# EAGLE board godwit-v01-panel (EAGLE 6.4), part 1 of 2
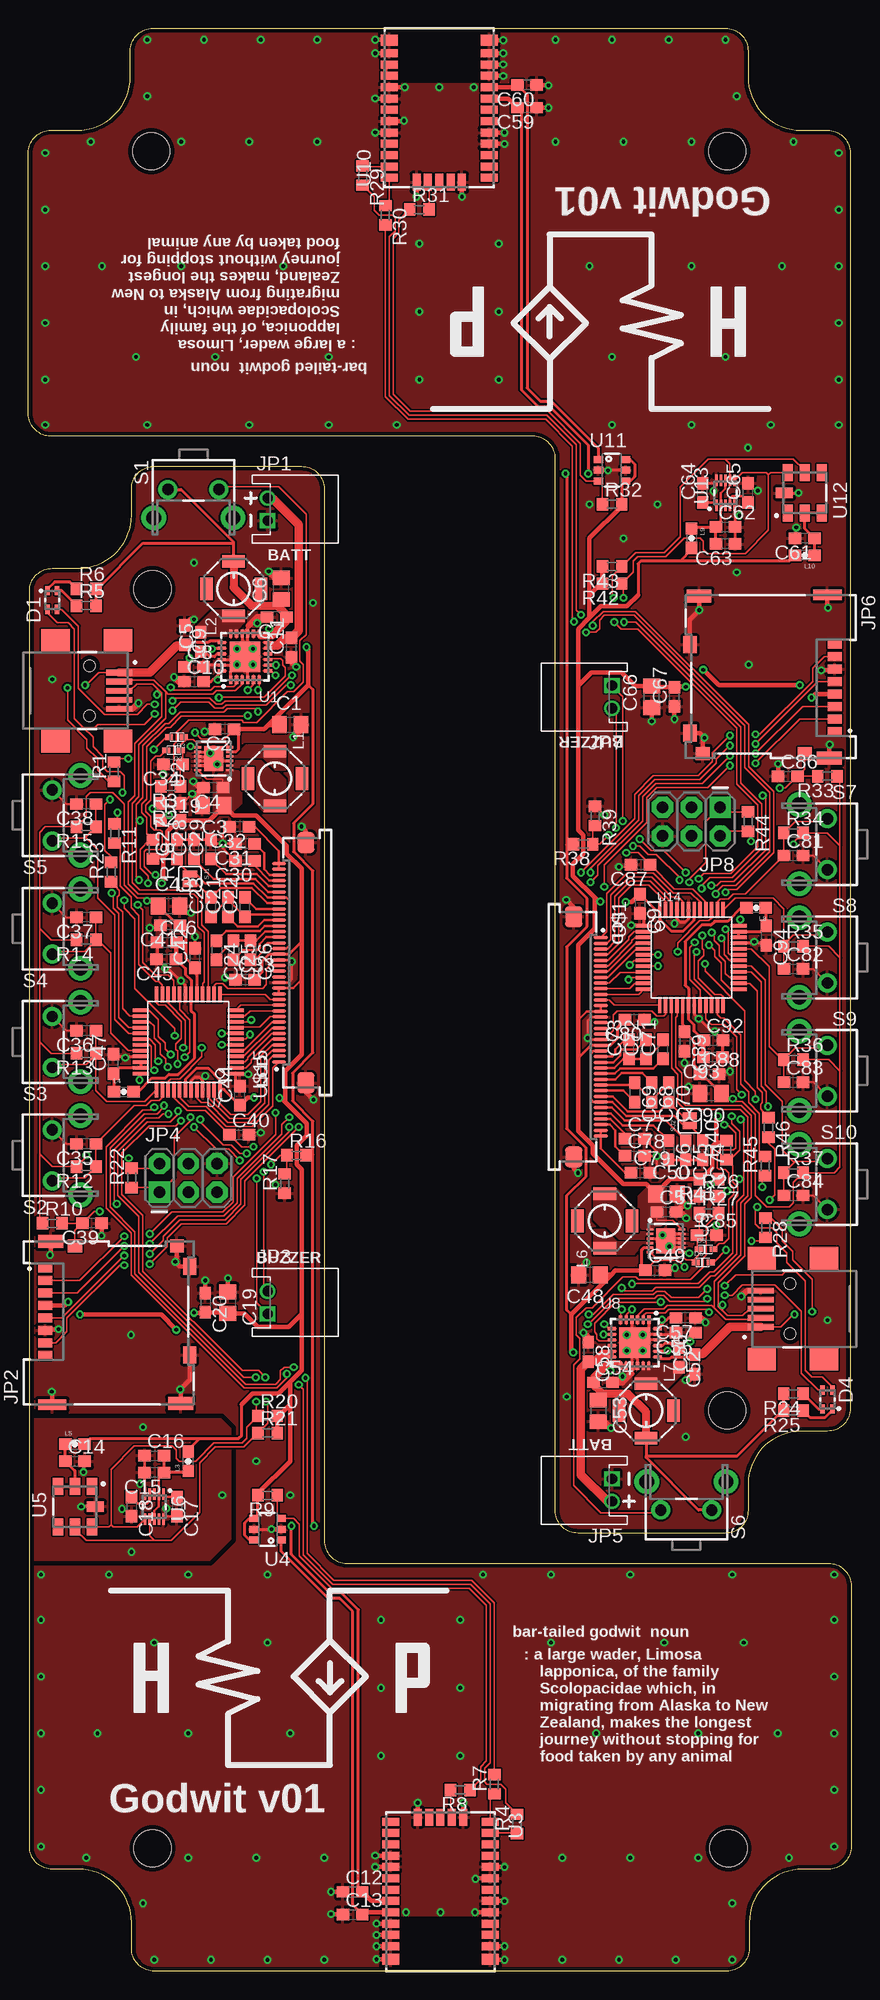
[diagram p0: board, top side]
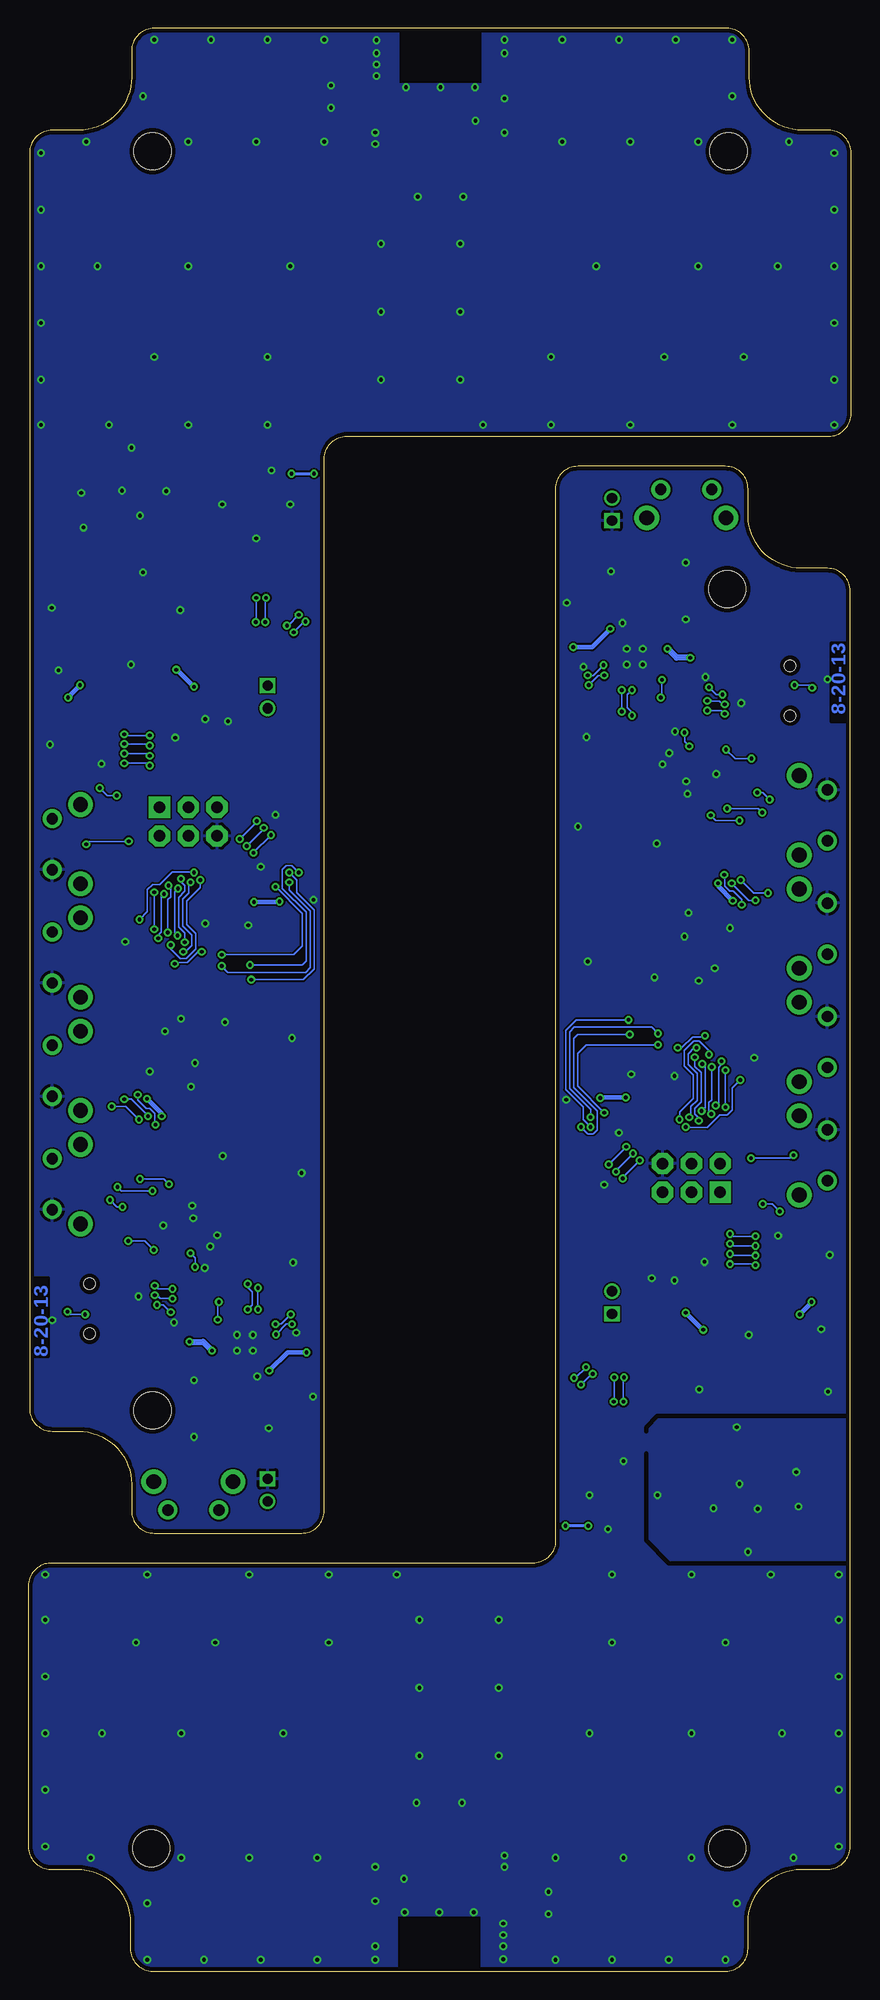
[diagram p1: board, bottom side, seen from below]

Size 72.61 x 171.45 mm. Coordinates in mm from the lower left corner, seen from the top.
Outline: 4.41,9 2.11,9 arc-90 0.11,11 0.11,121.8 arc-90 2.11,123.8 4.41,123.8 arc90 9.11,128.5 9.11,130.8 arc-90 11.11,132.8 24.11,132.8 arc-90 26.11,130.8 26.11,38 arc90 28.11,36 70.61,36 arc-90 72.61,34 72.61,11 arc-90 70.61,9 68.31,9 arc90 63.61,4.3 63.61,2 arc-90 61.61,0 11.11,0 arc-90 9.11,2 9.11,4.3 arc90 4.41,9
Outline: 68.2,162.45 70.5,162.45 arc-90 72.5,160.45 72.5,49.65 arc-90 70.5,47.65 68.2,47.65 arc90 63.5,42.95 63.5,40.65 arc-90 61.5,38.65 48.5,38.65 arc-90 46.5,40.65 46.5,133.45 arc90 44.5,135.45 2,135.45 arc-90 0,137.45 0,160.45 arc-90 2,162.45 4.3,162.45 arc90 9,167.15 9,169.45 arc-90 11,171.45 61.5,171.45 arc-90 63.5,169.45 63.5,167.15 arc90 68.2,162.45
Copper layers (1*16): Top 0.0356mm / dielectric 1.5011mm / Bottom 0.0356mm
Design rules "OSHPark *": minimum track width 6mil, minimum drill 13mil, track to track 6mil, track to pad 6mil, pad to pad 6mil, via to via 6mil, smd to smd 6mil, copper to edge 15mil, drill to drill 6mil, minimum pad ring 7mil, minimum via ring 7mil, stop-mask expansion 4mil, vias tented up to drill 13mil, thermal gap 10mil
Holes 3.26 mm at 10.95,10.84 61.77,10.84 10.95,121.96 61.66,160.61 10.84,160.61 61.66,49.49
tKeepout: area 8.1,8 to 13.8,13.6; area 59,8 to 64.6,13.6; area 8.1,119.2 to 13.8,124.8
tRestrict: 7 lines
bRestrict: 7 lines

## Footprints (pad centres in the part's own frame; a part is rotated, then mirrored left to right if it is on the bottom)
C0805 = smd 1.3 x 1.5: 1 -0.95,0; 2 0.95,0
C0603 = smd 1.1 x 1: 1 -0.85,0; 2 0.85,0
LED-2-1.6X1.25 = smd 0.8 x 0.4: 1 0.825,0.43; 2 -0.825,0.43; 3 0.825,-0.43; 4 -0.825,-0.43
SOD523 = smd 0.7 x 0.5: A 0.7,0; C -0.6,0
USB-MINIB-M26FTR = smd 0.5 x 2.3: 1 -1.6,0.1; 2 -0.8,0.1; 3 0,0.1; 4 0.8,0.1; 5 1.6,0.1 | smd 2 x 2.5: SHIELD1 -4.45,0; SHIELD2 -4.45,-5.5; SHIELD3 4.45,0; SHIELD4 4.45,-5.5 | hole 1: -2.2,-2.5; 2.2,-2.5
JST-PH-2-RA = drill 0.9 square: 1 1,0 | drill 0.9: 2 -1,0
MICROSD-5031821853 = smd 0.8 x 1.24: 1 12.045,0.63; 2 10.945,0.63; 3 9.845,0.63; 4 8.745,0.63; 5 7.645,0.63; 6 6.545,0.63; 7 5.445,0.63; 8 4.345,0.63 | smd 1.16 x 1.25: CRD_DETH 13.985,-2 | smd 1.16 x 1.2: CRD_DETL 13.985,-11 | smd 0.95 x 2.5: SHIELD1 0,0 | smd 1.15 x 2.2: SHIELD2 0.1,-11.33; SHIELD5 14.39,0.15 | smd 1.5 x 1.15: SHIELD3 4.405,-12.125; SHIELD4 12.185,-12.125
2X3-NS = drill 1.016 pad 1.88 square: 1 -2.54,-1.27 | drill 1.016 pad 1.88 octagon: 2 -2.54,1.27; 3 0,-1.27; 4 0,1.27; 5 2.54,-1.27; 6 2.54,1.27
SRU5028 = smd 1.1 x 2: 1 -2.4,0; 2 2.4,0 | smd 2 x 1.1: 3 0,-2.4; 4 0,2.4
0603 = smd 1.1 x 1: 1 -0.85,0; 2 0.85,0
R0603 = smd 1 x 1.1: 1 -0.85,0; 2 0.85,0
FSMRA = drill 1 pad 1.676: 1 -2.25,0; 3 2.25,0 | drill 1.3 pad 2.184: SHIELD1 -3.5,2.49; SHIELD2 3.5,2.49
SJ_2S = smd 0.635 x 1.27: 1 -0.412,0; 2 0.412,0
VQFN-24 = smd 0.28 x 0.71: 1 1.251,2.044; 2 0.751,2.044; 3 0.251,2.044; 4 -0.249,2.044; 5 -0.749,2.044; 6 -1.249,2.044; 13 -1.251,-2.044; 14 -0.751,-2.044; 15 -0.251,-2.044; 16 0.249,-2.044; 17 0.749,-2.044; 18 1.249,-2.044 | smd 0.71 x 0.28: 7 -2.044,1.251; 8 -2.044,0.751; 9 -2.044,0.251; 10 -2.044,-0.249; 11 -2.044,-0.749; 12 -2.044,-1.249; 19 2.044,-1.251; 20 2.044,-0.751; 21 2.044,-0.251; 22 2.044,0.249; 23 2.044,0.749; 24 2.044,1.249 | smd 2.7 x 2.7: PAD 0,0
WSON-12 = smd 0.2 x 0.6: 1 -1,-1.405; 2 -0.6,-1.405; 3 -0.2,-1.405; 4 0.2,-1.405; 5 0.6,-1.405; 6 1,-1.405; 7 1,1.405; 8 0.6,1.405; 9 0.2,1.405; 10 -0.2,1.405; 11 -0.6,1.405; 12 -1,1.405 | smd 2.2 x 1.68: PAD 0,0
UC530 = smd 0.7 x 1.5: 1 -6.2,-4.4; 2 -5.2,-4.4; 3 -4.2,-4.4; 4 -3.2,-4.4; 5 -2.2,-4.4; 6 -1.2,-4.4; 7 -0.2,-4.4; 8 0.8,-4.4; 9 1.8,-4.4; 10 2.8,-4.4; 11 3.8,-4.4; 12 4.8,-4.4; 15 4.8,4.4; 16 3.8,4.4; 17 2.8,4.4; 18 1.8,4.4; 19 0.8,4.4; 20 -0.2,4.4; 21 -1.2,4.4; 22 -2.2,4.4; 23 -3.2,4.4; 24 -4.2,4.4; 25 -5.2,4.4; 26 -6.2,4.4 | smd 1 x 1.5: 13 5.95,-4.4; 14 5.95,4.4 | smd 1.5 x 0.7: 27 -6.6,2; 28 -6.6,1; 29 -6.6,0; 30 -6.6,-1; 31 -6.6,-2
SOT23-6 = smd 0.63 x 0.8: 1 -0.95,-1.2; 2 0,-1.2; 3 0.95,-1.2; 4 0.95,1.2; 5 0,1.2; 6 -0.95,1.2
BMP180 = smd 0.9 x 1.5: 1 1.5,1.8; 2 0,1.8; 3 -1.5,1.8; 4 -1.5,-1.8; 5 0,-1.8; 6 1.5,-1.8 | smd 1.5 x 0.9: 7 1.8,0
DFN-10-2X2 = smd 1 x 0.225: 1 -1.1,0.8; 2 -1.1,0.4; 3 -1.1,0; 4 -1.1,-0.4; 5 -1.1,-0.8; 6 1.1,-0.8; 7 1.1,-0.4; 8 1.1,0; 9 1.1,0.4; 10 1.1,0.8
TQFP48 = smd 1.4 x 0.3: 1 -4.191,2.794; 2 -4.191,2.286; 3 -4.191,1.778; 4 -4.191,1.27; 5 -4.191,0.762; 6 -4.191,0.254; 7 -4.191,-0.254; 8 -4.191,-0.762; 9 -4.191,-1.27; 10 -4.191,-1.778; 11 -4.191,-2.286; 12 -4.191,-2.794; 25 4.191,-2.794; 26 4.191,-2.286; 27 4.191,-1.778; 28 4.191,-1.27; 29 4.191,-0.762; 30 4.191,-0.254; 31 4.191,0.254; 32 4.191,0.762; 33 4.191,1.27; 34 4.191,1.778; 35 4.191,2.286; 36 4.191,2.794 | smd 0.3 x 1.4: 13 -2.794,-4.191; 14 -2.286,-4.191; 15 -1.778,-4.191; 16 -1.27,-4.191; 17 -0.762,-4.191; 18 -0.254,-4.191; 19 0.254,-4.191; 20 0.762,-4.191; 21 1.27,-4.191; 22 1.778,-4.191; 23 2.286,-4.191; 24 2.794,-4.191; 37 2.794,4.191; 38 2.286,4.191; 39 1.778,4.191; 40 1.27,4.191; 41 0.762,4.191; 42 0.254,4.191; 43 -0.254,4.191; 44 -0.762,4.191; 45 -1.27,4.191; 46 -1.778,4.191; 47 -2.286,4.191; 48 -2.794,4.191
128240D = smd 0.3 x 1.25: 1 -8.75,0; 2 -8.25,0; 3 -7.75,0; 4 -7.25,0; 5 -6.75,0; 6 -6.25,0; 7 -5.75,0; 8 -5.25,0; 9 -4.75,0; 10 -4.25,0; 11 -3.75,0; 12 -3.25,0; 13 -2.75,0; 14 -2.25,0; 15 -1.75,0; 16 -1.25,0; 17 -0.75,0; 18 -0.25,0; 19 0.25,0; 20 0.75,0; 21 1.25,0; 22 1.75,0; 23 2.25,0; 24 2.75,0; 25 3.25,0; 26 3.75,0; 27 4.25,0; 28 4.75,0; 29 5.25,0; 30 5.75,0; 31 6.25,0; 32 6.75,0; 33 7.25,0; 34 7.75,0; 35 8.25,0; 36 8.75,0 | smd 1.8 x 1.5: SHIELD1 -10.6,-2.375; SHIELD2 10.6,-2.375

## Placement (x,y rotation side)
C1  10uF  [C0805]  23.11,110 0 top
C2  0.1uF  [C0603]  17.31,109.6 180 top
C3  22uF  [C0805]  16.31,102.85 180 top
C4  0.1uF  [C0603]  16.31,104.45 180 top
C5  33nF  [C0603]  15.21,117.3 90 top
C6  22uF  [C0805]  22.31,122 90 top
C7  0.1uF  [C0603]  21.91,119.5 180 top
C8  1uF  [C0603]  14.61,115.1 0 top
C9  2.2uF  [C0603]  13.81,117.9 270 top
C10  1uF  [C0603]  14.61,113.8 0 top
C11  2.2uF  [C0603]  23.21,116.8 90 top
C12  1uF  [C0603]  28.61,7 0 top
C13  4.7uF  [C0603]  28.61,5 0 top
C14  0.1uF  [C0603]  4.11,45 0 top
C15  0.1uF  [C0603]  11.11,44 180 top
C16  1uF  [C0603]  11.11,45.5 0 top
C17  0.1uF  [C0603]  13.11,41 270 top
C18  0.1uF  [C0603]  9.11,41 270 top
C19  10uF  [C0805]  17.61,59 270 top
C20  0.1uF  [C0603]  15.61,59 270 top
C21  1uF  [C0603]  17.61,93.9 90 top
C22  1uF  [C0603]  19.11,93.9 90 top
C23  DNP  [C0603]  16.11,93.9 90 top
C24  1uF  [C0603]  16.61,90.1 270 top
C25  1uF  [C0603]  18.11,90.1 270 top
C26  1uF  [C0603]  19.61,90.1 270 top
C27  1uF  [C0603]  13.11,99 90 top
C28  1uF  [C0603]  14.61,99 90 top
C29  1uF  [C0603]  16.11,99 90 top
C30  1uF  [C0603]  19.11,98 180 top
C31  1uF  [C0603]  19.11,99.5 180 top
C32  1uF  [C0603]  18.61,101 180 top
C33  1uF  [C0603]  19.11,87.5 0 top
C34  0.1uF  [C0603]  12.76,106.5 180 top
C35  0.1uF  [C0603]  5.11,73 180 top
C36  0.1uF  [C0603]  5.11,83 180 top
C37  0.1uF  [C0603]  5.11,93 180 top
C38  0.1uF  [C0603]  5.11,103 180 top
C39  0.1uF  [C0603]  5.61,66 180 top
C40  0.1uF  [C0603]  18.61,73.8 0 top
C41  0.1uF  [C0603]  12.51,92.3 180 top
C42  33nF  [C0603]  14.71,89.4 90 top
C43  22uF  [C0805]  12.41,94 0 top
C44  33nF  [C0603]  18.66,77.25 90 top
C45  0.1uF  [C0603]  12.16,89.3 180 top
C46  2.2uF  [C0603]  12.21,90.8 0 top
C47  0.1uF  [C0603]  7.51,80.05 90 top
C48  10uF  [C0805]  49.5,61.45 180 top
C49  0.1uF  [C0603]  55.3,61.85 0 top
C50  22uF  [C0805]  56.3,68.6 0 top
C51  0.1uF  [C0603]  56.3,67 0 top
C52  33nF  [C0603]  57.4,54.15 270 top
C53  22uF  [C0805]  50.3,49.45 270 top
C54  0.1uF  [C0603]  50.7,51.95 0 top
C55  1uF  [C0603]  58,56.35 180 top
C56  2.2uF  [C0603]  58.8,53.55 90 top
C57  1uF  [C0603]  58,57.65 180 top
C58  2.2uF  [C0603]  49.4,54.65 270 top
C59  1uF  [C0603]  44,164.45 180 top
C60  4.7uF  [C0603]  44,166.45 180 top
C61  0.1uF  [C0603]  68.5,126.45 180 top
C62  0.1uF  [C0603]  61.5,127.45 0 top
C63  1uF  [C0603]  61.5,125.95 180 top
C64  0.1uF  [C0603]  59.5,130.45 90 top
C65  0.1uF  [C0603]  63.5,130.45 90 top
C66  10uF  [C0805]  55,112.45 90 top
C67  0.1uF  [C0603]  57,112.45 90 top
C68  1uF  [C0603]  55,77.55 270 top
C69  1uF  [C0603]  53.5,77.55 270 top
C70  DNP  [C0603]  56.5,77.55 270 top
C71  1uF  [C0603]  56,81.35 90 top
C72  1uF  [C0603]  54.5,81.35 90 top
C73  1uF  [C0603]  53,81.35 90 top
C74  1uF  [C0603]  59.5,72.45 270 top
C75  1uF  [C0603]  58,72.45 270 top
C76  1uF  [C0603]  56.5,72.45 270 top
C77  1uF  [C0603]  53.5,73.45 0 top
C78  1uF  [C0603]  53.5,71.95 0 top
C79  1uF  [C0603]  54,70.45 0 top
C80  1uF  [C0603]  53.5,83.95 180 top
C81  0.1uF  [C0603]  67.5,98.45 0 top
C82  0.1uF  [C0603]  67.5,88.45 0 top
C83  0.1uF  [C0603]  67.5,78.45 0 top
C84  0.1uF  [C0603]  67.5,68.45 0 top
C85  0.1uF  [C0603]  59.85,64.95 0 top
C86  0.1uF  [C0603]  67,105.45 0 top
C87  0.1uF  [C0603]  54,97.65 180 top
C88  0.1uF  [C0603]  60.1,79.15 0 top
C89  33nF  [C0603]  57.9,82.05 270 top
C90  22uF  [C0805]  60.2,77.45 180 top
C91  33nF  [C0603]  53.95,94.2 270 top
C92  0.1uF  [C0603]  60.45,82.15 0 top
C93  2.2uF  [C0603]  60.4,80.65 180 top
C94  0.1uF  [C0603]  65.1,91.4 270 top
D1  LED-RG-APT  [LED-2-1.6X1.25]  2.11,121 90 top
D2  [SOD523]  12.86,107.75 180 top
D3  [SOD523]  13.11,108.9 180 top
D4  LED-RG-APT  [LED-2-1.6X1.25]  70.5,50.45 270 top
D5  [SOD523]  59.75,63.7 0 top
D6  [SOD523]  59.5,62.55 0 top
J1  USB-MINIB-M26FTR  [USB-MINIB-M26FTR]  7.91,113 270 top
J2  USB-MINIB-M26FTR  [USB-MINIB-M26FTR]  64.7,58.45 90 top
JP1  M02-JST-PH-2-RA  [JST-PH-2-RA]  21.11,129 270 top
JP2  MICRO-SD-5031821853  [MICROSD-5031821853]  2.11,50 90 top
JP3  M02-JST-PH-2-RA  [JST-PH-2-RA]  21.11,59 270 top
JP4  [2X3-NS]  14.11,70 0 top
JP5  M02-JST-PH-2-RA  [JST-PH-2-RA]  51.5,42.45 90 top
JP6  MICRO-SD-5031821853  [MICROSD-5031821853]  70.5,121.45 270 top
JP7  M02-JST-PH-2-RA  [JST-PH-2-RA]  51.5,112.45 90 top
JP8  [2X3-NS]  58.5,101.45 180 top
L1  2.2uH  [SRU5028]  21.76,105.25 270 top
L2  1uH  [SRU5028]  18.11,122 90 top
L3  2.5K  [0603]  14.11,45 90 top
L4  2.5K  [0603]  8.41,77.6 0 top
L5  2.5K  [0603]  4.11,46.5 0 top
L6  2.2uH  [SRU5028]  50.85,66.2 90 top
L7  1uH  [SRU5028]  54.5,49.45 270 top
L8  2.5K  [0603]  64.2,93.85 180 top
L9  2.5K  [0603]  58.5,126.45 270 top
L10  2.5K  [0603]  68.5,124.95 180 top
R1  100K  [R0603]  7.56,105.85 90 top
R2  2.2K  [R0603]  12.56,103.05 180 top
R3  100K  [R0603]  12.56,104.55 180 top
R4  220R  [R0603]  43.11,13 90 top
R5  2.2K  [R0603]  5.11,120.5 0 top
R6  2.2K  [R0603]  5.11,122 0 top
R7  220R  [R0603]  41.11,16.5 90 top
R8  220R  [R0603]  38.11,16 180 top
R9  100K  [R0603]  21.11,42 180 top
R10  100K  [R0603]  2.11,66 0 top
R11  100K  [R0603]  7.61,100.4 270 top
R12  100K  [R0603]  5.11,71 180 top
R13  100K  [R0603]  5.11,81 180 top
R14  100K  [R0603]  5.11,91 180 top
R15  100K  [R0603]  5.11,101 180 top
R16  59K  [R0603]  23.66,72 0 top
R17  41.2K  [R0603]  22.61,69.5 90 top
R18  10K  [R0603]  11.01,99 270 top
R19  10K  [R0603]  12.56,101.55 0 top
R20  10K  [R0603]  21.11,49 0 top
R21  10K  [R0603]  21.11,47.5 0 top
R22  10K  [R0603]  9.11,70 90 top
R23  100K  [R0603]  7.31,97 90 top
R24  2.2K  [R0603]  67.5,50.95 180 top
R25  2.2K  [R0603]  67.5,49.45 180 top
R26  2.2K  [R0603]  60.05,68.4 0 top
R27  100K  [R0603]  60.05,66.9 0 top
R28  100K  [R0603]  65.05,65.6 270 top
R29  220R  [R0603]  29.5,158.45 270 top
R30  220R  [R0603]  31.5,154.95 270 top
R31  220R  [R0603]  34.5,155.45 0 top
R32  100K  [R0603]  51.5,129.45 0 top
R33  100K  [R0603]  70.5,105.45 180 top
R34  100K  [R0603]  67.5,100.45 0 top
R35  100K  [R0603]  67.5,90.45 0 top
R36  100K  [R0603]  67.5,80.45 0 top
R37  100K  [R0603]  67.5,70.45 0 top
R38  59K  [R0603]  48.95,99.45 180 top
R39  41.2K  [R0603]  50,101.95 270 top
R40  10K  [R0603]  61.6,72.45 90 top
R41  10K  [R0603]  60.05,69.9 180 top
R42  10K  [R0603]  51.5,122.45 180 top
R43  10K  [R0603]  51.5,123.95 180 top
R44  10K  [R0603]  63.5,101.45 270 top
R45  100K  [R0603]  65,71.05 90 top
R46  100K  [R0603]  65.3,74.45 270 top
S1  [FSMRA]  14.56,130.75 180 top
S2  [FSMRA]  2.11,72 270 top
S3  [FSMRA]  2.11,82 270 top
S4  [FSMRA]  2.11,92 270 top
S5  [FSMRA]  2.11,102 270 top
S6  [FSMRA]  58.05,40.7 0 top
S7  [FSMRA]  70.5,99.45 90 top
S8  [FSMRA]  70.5,89.45 90 top
S9  [FSMRA]  70.5,79.45 90 top
S10  [FSMRA]  70.5,69.45 90 top
SJ1  SOLDERJUMPERNC  [SJ_2S]  14.26,96.4 270 top
SJ2  SOLDERJUMPERNC  [SJ_2S]  58.35,75.05 90 top
U1  BQ24251  [VQFN-24]  19.11,116 180 top
U2  LM3668-3034  [WSON-12]  16.36,107 90 top
U3  UC530  [UC530]  36.36,7 270 top
U4  AAT4280A  [SOT23-6]  21.11,39 90 top
U5  BMP180  [BMP180]  4.11,41 0 top
U6  MAG3110  [DFN-10-2X2]  11.11,41 270 top
U7  ATUCL4U-TQFP48  [TQFP48]  14.11,82 180 top
U8  BQ24251  [VQFN-24]  53.5,55.45 0 top
U9  LM3668-3034  [WSON-12]  56.25,64.45 270 top
U10  UC530  [UC530]  36.25,164.45 90 top
U11  AAT4280A  [SOT23-6]  51.5,132.45 270 top
U12  BMP180  [BMP180]  68.5,130.45 180 top
U13  MAG3110  [DFN-10-2X2]  61.5,130.45 90 top
U14  ATUCL4U-TQFP48  [TQFP48]  58.5,89.45 0 top
U$1  128240D  [128240D]  50.5,82.45 270 top
U$2  [LOGO_MED_SLK]  65.5,153.45 180 top
U$15  128240D  [128240D]  22.11,89 90 top
U$21  [LOGO_MED_SLK]  7.11,18 0 top

## Library data of the parts
C1 C19 C48 C66 = hybridpi-rcl; VENDOR: DIGI-KEY; VENDOR_PN: 490-6470-1-ND
C2 C4 C7 C14 C15 C17 C18 C20 C34-C42 C44 C45 C47 C49 C51 C54 C61 C62 C64 C65 C67 C81-C89 C91 C92 C94 R1-R46 = hybridpi-rcl
C3 C6 C43 C50 C53 C90 = hybridpi-rcl; VENDOR: DIGI-KEY; VENDOR_PN: 587-1305-1-ND
C5 C52 = hybridpi-rcl; VOLTAGE: >15
C8 C10 C12 C16 C55 C57 C59 C63 = hybridpi-rcl; VOLTAGE: >=10V
C9 C11 C46 C56 C58 C93 = hybridpi-rcl; VENDOR: DIGI-KEY; VENDOR_PN: 445-5167-1-ND
C13 C60 = hybridpi-rcl; VENDOR: DIGI-KEY; VENDOR_PN: 490-3297-1-ND; VOLTAGE: >=10V
C21-C33 C68-C80 = hybridpi-rcl; VENDOR: DIGI-KEY; VENDOR_PN: 587-1248-1-ND
D1 D4 = hybridpi-opto; EAGLEUP: LED-1p6x1p25
D2 D3 D5 D6 = hybridpi-discrete-semi
J1 J2 = hybridpi-connector; EAGLEUP: USB-MINIB; VENDOR: DIGI-KEY; VENDOR_PN: ED2992CT-ND
JP1 JP3 JP5 JP7 = hybridpi-connector; EAGLEUP: JST-PH-2-RA
JP2 JP6 = hybridpi-connector; EAGLEUP: MICROSD-5031821853
JP4 JP8 = hybridpi-connector; EAGLEUP: M03X2
L1 L2 L6 L7 U1 U8 = hybridpi
L3-L5 L8-L10 = hybridpi; EAGLEUP: F0603; VENDOR: DIGI-KEY; VENDOR_PN: 587-1893-1-ND
S1-S10 = hybridpi-electromechanical; EAGLEUP: TACTILE-PTH-FSMRA7JH; VENDOR: DIGI-KEY; VENDOR_PN: 450-1661-ND
SJ1 SJ2 = hybridpi-passive
U2 U9 = hybridpi; EAGLEUP: WSON-12-3p1x3p1
U3 U10 = hybridpi-rf; EAGLEUP: UC530
U4 U11 = hybridpi-poweric; VENDOR: DIGI-KEY; VENDOR_PN: 863-1486-1-ND
U5 U12 = hybridpi-sensor; EAGLEUP: BMP180
U6 U13 = hybridpi-sensor; EAGLEUP: DFN-10-2x2
U7 U14 = hybridpi-digitalic; EAGLEUP: TQFP-48
U$1 U$15 = hybridpi-connector; EAGLEUP: 128240D_CON
U$2 U$21 = hybridpi-aesthetics

## Nets
3.0V: C3.1 C4.1 C19.2 C20.2 C33.2 C41.1 C42.1 C43.1 C44.1 JP2.4 JP4.2 L3.2 L5.2 R9.2 R10.1 R12.2 R13.2 R14.2 R15.2 R18.2 R19.2 R20.2 R21.2 R22.2 U2.1 U2.12 U4.4 U4.6 U7.17 U7.42 U7.48 U$15.13 U$15.14 U$15.20
3.0V1: C50.1 C51.1 C66.2 C67.2 C80.2 C88.1 C89.1 C90.1 C91.1 JP6.4 JP8.2 L9.2 L10.2 R32.2 R33.1 R34.2 R35.2 R36.2 R37.2 R40.2 R41.2 R42.2 R43.2 R44.2 U9.1 U9.12 U11.4 U11.6 U14.17 U14.42 U14.48 U$1.13 U$1.14 U$1.20
3V_EN: D2.A U7.21
3V_EN1: D5.A U14.21
!PG!_LED: D1.4 U1.8
!PG!_LED1: D4.4 U8.8
!RESET!: JP4.1 R22.1 U7.22
!RESET!1: JP8.1 R44.1 U14.22
B_BCK: C38.1 R15.1 S5.3 U7.29
B_BCK1: C84.1 R37.1 S10.3 U14.29
B_DWN: C37.1 R14.1 S4.3 U7.32
B_DWN1: C83.1 R36.1 S9.3 U14.32
B_SEL: C36.1 R13.1 S3.3 U7.37
B_SEL1: C82.1 R35.1 S8.3 U14.37
B_UP: C35.1 R12.1 S2.3 U7.38
B_UP1: C81.1 R34.1 S7.3 U14.38
CHRG_SCL: R19.1 U1.6 U7.28
CHRG_SCL1: R41.1 U8.6 U14.28
CHRG_SDA: R18.1 U1.5 U7.39
CHRG_SDA1: R40.1 U8.5 U14.39
CHRG_STAT: R23.1 U7.26
CHRG_STAT1: R46.1 U14.26
GND: C1.2 C2.2 C3.2 C4.2 C6.2 C7.2 C8.2 C9.1 C10.1 C11.1 C12.1 C13.1 C14.2 C15.2 C16.1 C17.2 C18.2 C19.1 C20.1 C27.2 C28.2 C29.2 C30.2 C31.2 C32.2 C33.1 C34.2 C35.2 C36.2 C37.2 C38.2 C39.1 C40.2 C41.2 C42.2 C43.2 C44.2 C45.2 C46.1 C47.2 J1.5 JP1.1 JP2.6 JP2.CRD_DETL JP2.SHIELD1 JP2.SHIELD2 JP2.SHIELD3 JP2.SHIELD4 JP2.SHIELD5 JP4.6 R2.1 R17.1 S2.1 S3.1 S4.1 S5.1 U1.1 U1.4 U1.15 U1.16 U1.22 U1.23 U1.PAD U2.3 U2.8 U2.9 U2.10 U2.11 U2.PAD U3.4 U3.5 U3.10 U3.11 U3.12 U3.13 U3.14 U3.15 U3.18 U3.19 U3.21 U3.22 U3.27 U3.31 U4.2 U4.5 U5.7 U6.5 U6.10 U7.1 U7.19 U7.33 U7.43 U7.45 U$15.15 U$15.19 U$15.SHIELD1 U$15.SHIELD2
GND1: C48.2 C49.2 C50.2 C51.2 C53.2 C54.2 C55.2 C56.1 C57.1 C58.1 C59.1 C60.1 C61.2 C62.2 C63.1 C64.2 C65.2 C66.1 C67.1 C74.2 C75.2 C76.2 C77.2 C78.2 C79.2 C80.1 C81.2 C82.2 C83.2 C84.2 C85.2 C86.1 C87.2 C88.2 C89.2 C90.2 C91.2 C92.2 C93.1 C94.2 J2.5 JP5.1 JP6.6 JP6.CRD_DETL JP6.SHIELD1 JP6.SHIELD2 JP6.SHIELD3 JP6.SHIELD4 JP6.SHIELD5 JP8.6 R26.1 R39.1 S7.1 S8.1 S9.1 S10.1 U8.1 U8.4 U8.15 U8.16 U8.22 U8.23 U8.PAD U9.3 U9.8 U9.9 U9.10 U9.11 U9.PAD U10.4 U10.5 U10.10 U10.11 U10.12 U10.13 U10.14 U10.15 U10.18 U10.19 U10.21 U10.22 U10.27 U10.31 U11.2 U11.5 U12.7 U13.5 U13.10 U14.1 U14.19 U14.33 U14.43 U14.45 U$1.15 U$1.19 U$1.SHIELD1 U$1.SHIELD2
GPS_RX: R7.2 U7.30
GPS_RX1: R30.2 U14.30
GPS_TX: R4.2 U7.31
GPS_TX1: R29.2 U14.31
LCD_!CS!: U7.14 U$15.18
LCD_!CS!1: U14.14 U$1.18
LCD_!RST!: U7.13 U$15.12
LCD_!RST!1: U14.13 U$1.12
LCD_A0: U7.41 U$15.1
LCD_A1: U14.41 U$1.1
LCD_D0: U7.46 U$15.3
LCD_D1: U7.47 U$15.4
LCD_D2: U7.2 U$15.5
LCD_D3: U7.3 U$15.6
LCD_D4: U7.4 U$15.7
LCD_D5: U7.5 U$15.8
LCD_D6: U7.9 U$15.9
LCD_D7: U7.11 U$15.10
LCD_D8: U14.11 U$1.10
LCD_D9: U14.9 U$1.9
LCD_D10: U14.5 U$1.8
LCD_D11: U14.4 U$1.7
LCD_D12: U14.3 U$1.6
LCD_D13: U14.47 U$1.4
LCD_D14: U14.46 U$1.3
LCD_D15: U14.2 U$1.5
LCD_RD: U7.12 U$15.11
LCD_RD1: U14.12 U$1.11
LCD_WR: U7.44 U$15.2
LCD_WR1: U14.44 U$1.2
LDO: C10.2 U1.9 U1.24
LDO1: C57.2 U8.9 U8.24
N$1: L1.2 U2.2
N$2: L1.1 U2.4
N$3: C5.1 U1.21
N$4: U3.16 U3.17
N$5: C5.2 L2.1 U1.17 U1.18
N$6: C8.1 U1.20
N$7: U1.10
N$8: D3.A R1.2
N$9: C34.1 D2.C D3.C R3.1 U2.6
N$10: U3.3
N$11: U3.6
N$12: U3.29
N$13: U3.7
N$14: U3.1
N$15: D1.3 R5.1
N$16: U3.20
N$17: U3.24
N$18: D1.1 R6.1
N$19: U3.30
N$20: U3.2
N$21: U3.23
N$22: C13.2 U3.9 U4.1
N$23: R4.1 U3.25
N$24: R7.1 U3.26
N$25: R8.2 U3.28
N$26: R8.1 R9.1 U4.3
N$27: C21.2 C22.1 C23.1 U$15.27
N$28: C18.1 U6.4
N$29: C17.1 U6.1
N$30: JP2.1
N$31: JP2.8
N$32: U6.9
N$33: C21.1 U$15.26
N$34: C22.2 U$15.28
N$35: C23.2 SJ1.2 U$15.29
N$36: C24.2 C25.1 C26.1 U$15.24
N$37: C24.1 U$15.25
N$38: C25.2 U$15.23
N$39: C26.2 U$15.22
N$40: C28.1 U$15.31
N$41: C29.1 U$15.32
N$42: C27.1 SJ1.1 U$15.21 U$15.30
N$43: C30.1 U$15.33
N$44: C31.1 U$15.34
N$45: C32.1 U$15.35 U$15.36
N$46: C40.1 R16.1 R17.2 U7.40
N$47: JP3.1 U7.36
N$48: C14.1 L5.1 U5.2 U5.3
N$49: JP3.2 U7.25
N$50: C47.1 L4.1 U7.34 U7.35
N$51: U$15.17
N$52: U$15.16
N$53: C45.1 C46.2 L4.2 U7.18
N$54: C15.1 C16.2 L3.1 U6.2 U6.8
N$55: JP4.3
N$56: JP4.5
N$57: JP4.4
N$58: L6.2 U9.2
N$59: L6.1 U9.4
N$60: C52.1 U8.21
N$61: C52.2 L7.1 U8.17 U8.18
N$62: C55.1 U8.20
N$63: D4.3 R24.1
N$64: D4.1 R25.1
N$65: U8.10
N$66: D6.A R28.2
N$67: C85.1 D5.C D6.C R27.1 U9.6
N$68: U10.16 U10.17
N$69: U10.3
N$70: U10.6
N$71: U10.29
N$72: U10.7
N$73: U10.1
N$74: U10.20
N$75: U10.24
N$76: U10.2
N$77: U10.23
N$78: U10.30
N$79: C60.2 U10.9 U11.1
N$80: R29.1 U10.25
N$81: R30.1 U10.26
N$82: R31.2 U10.28
N$83: R31.1 R32.1 U11.3
N$84: C65.1 U13.4
N$85: C64.1 U13.1
N$86: U13.9
N$87: JP6.1
N$88: R2.2 R3.2 R11.1 S1.1
N$89: JP6.8
N$90: C68.2 C69.1 C70.1 U$1.27
N$91: C68.1 U$1.26
N$92: C69.2 U$1.28
N$93: C70.2 SJ2.2 U$1.29
N$94: C71.2 C72.1 C73.1 U$1.24
N$95: C71.1 U$1.25
N$96: C72.2 U$1.23
N$97: C73.2 U$1.22
N$98: C74.1 SJ2.1 U$1.21 U$1.30
N$99: C75.1 U$1.31
N$100: C76.1 U$1.32
N$101: C77.1 U$1.33
N$102: C78.1 U$1.34
N$103: C79.1 U$1.35 U$1.36
N$104: U$1.17
N$105: U$1.16
N$106: C87.1 R38.1 R39.2 U14.40
N$107: JP7.1 U14.36
N$108: JP7.2 U14.25
N$109: C92.1 C93.2 L8.2 U14.18
N$110: C94.1 L8.1 U14.34 U14.35
N$111: C61.1 L10.1 U12.2 U12.3
N$112: C62.1 C63.2 L9.1 U13.2 U13.8
N$113: JP8.3
N$114: JP8.5
N$115: JP8.4
N$116: R26.2 R27.2 R45.1 S6.1
PWR_TACT: R11.2 U7.23
PWR_TACT1: R45.2 U14.23
SD_!CS!: JP2.2 U7.6
SD_!CS!1: JP6.2 U14.6
SD_CRD_DET: C39.2 JP2.CRD_DETH R10.2 U7.27
SD_CRD_DET1: C86.2 JP6.CRD_DETH R33.2 U14.27
SD_MISO: JP2.7 U7.7
SD_MISO1: JP6.7 U14.7
SD_MOSI: JP2.3 U7.8
SD_MOSI1: JP6.3 U14.8
SD_SCLK: JP2.5 U7.10
SD_SCLK1: JP6.5 U14.10
SENS_SCL: R21.1 U5.5 U6.7 U7.20
SENS_SCL1: R43.1 U12.5 U13.7 U14.20
SENS_SDA: R20.1 U5.6 U6.6 U7.24
SENS_SDA1: R42.1 U12.6 U13.6 U14.24
STAT_LED: D1.2 R23.2 U1.7
STAT_LED1: D4.2 R46.2 U8.7
USB_D+: J1.3 U1.2 U7.16
USB_D+1: J2.3 U8.2 U14.16
USB_D-: J1.2 U1.3 U7.15
USB_D-1: J2.2 U8.3 U14.15
V_BATT: C11.2 JP1.2 U1.11 U1.12
V_BATT1: C58.2 JP5.2 U8.11 U8.12
VBUS: C9.2 J1.1 R1.1 U1.19
VBUS1: C56.2 J2.1 R28.1 U8.19
VSYS: C1.1 C2.1 C6.1 C7.1 C12.2 L2.2 R5.2 R6.2 R16.2 S1.3 U1.13 U1.14 U2.5 U2.7 U3.8
VSYS1: C48.1 C49.1 C53.1 C54.1 C59.2 L7.2 R24.2 R25.2 R38.2 S6.3 U8.13 U8.14 U9.5 U9.7 U10.8